# EAGLE board hacksaw_control_r0 (EAGLE 7.3.0)
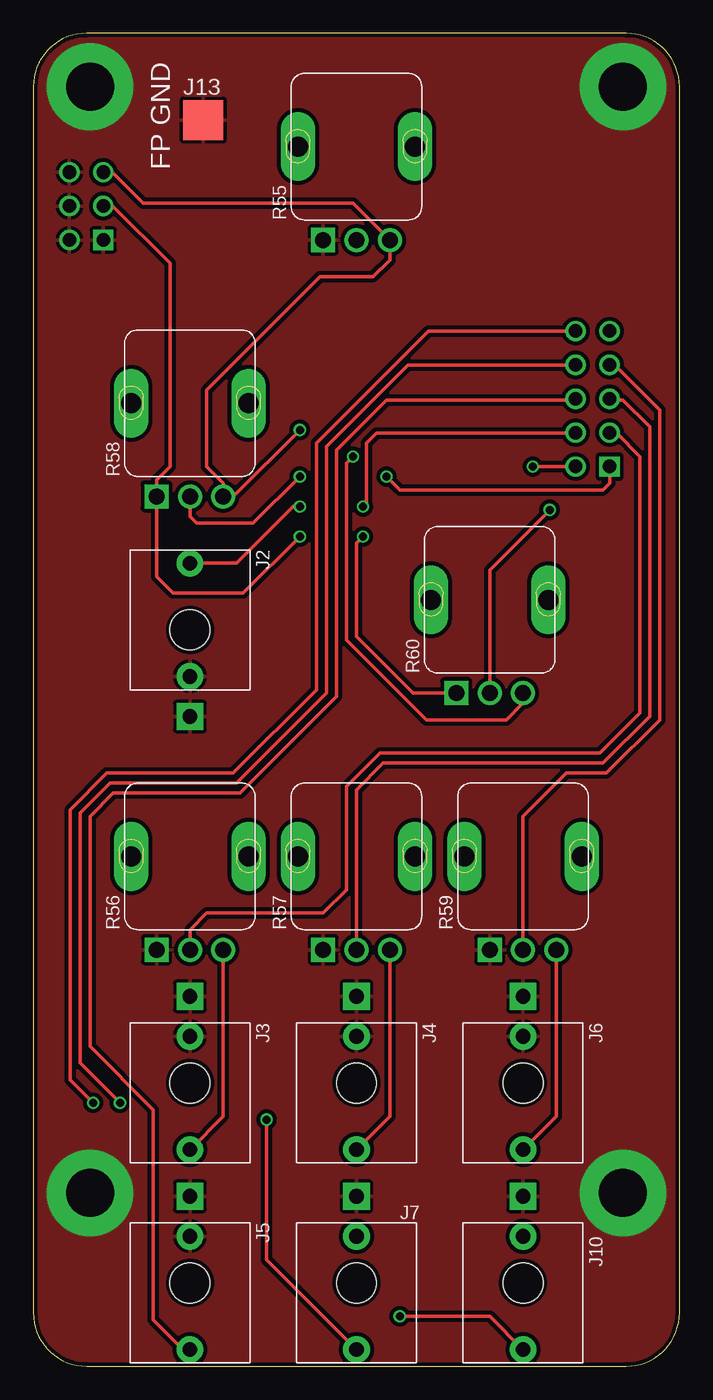
[diagram p0: board, top side]
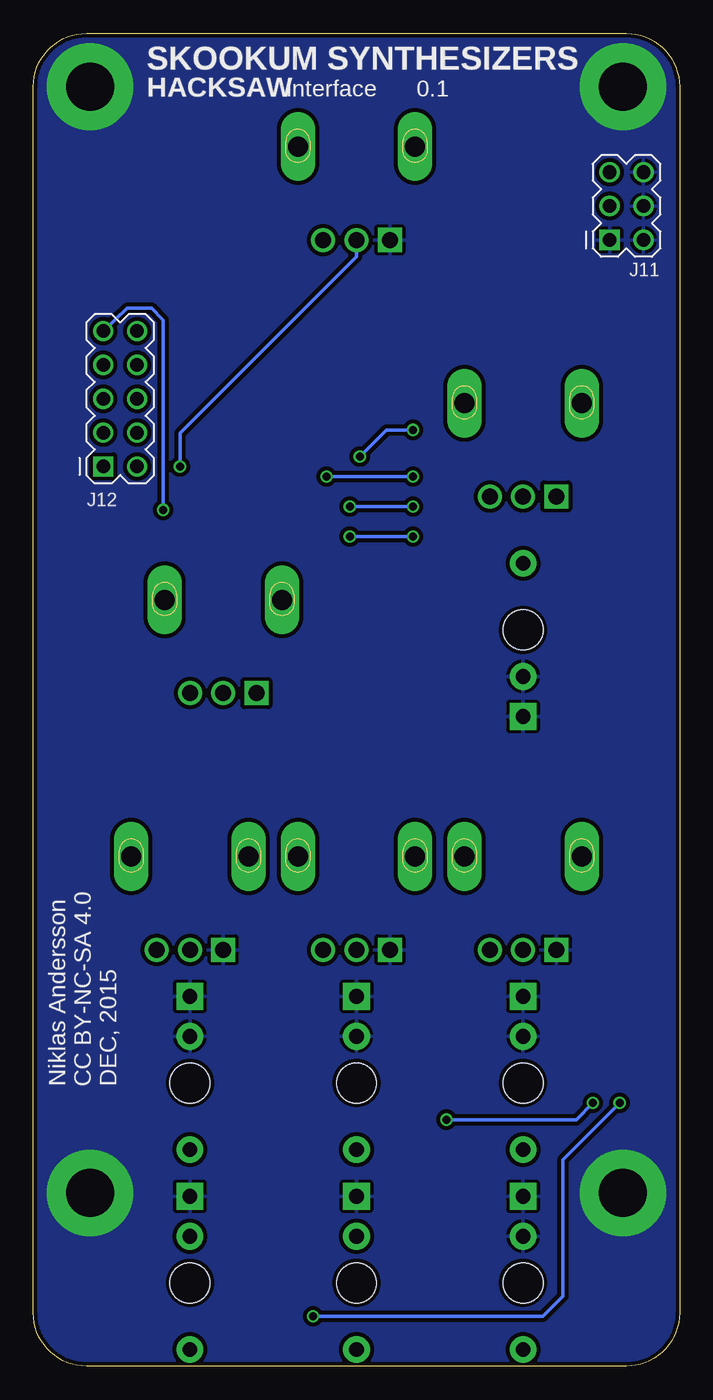
[diagram p1: board, bottom side, seen from below]

Size 48.5 x 100 mm. Coordinates in mm from the lower left corner, seen from the top.
Outline: 48.5,4 48.5,96 arc90 44.5,100 4,100 arc90 0,96 0,4 arc90 4,0 44.5,0 arc90 48.5,4
Copper layers (1*16): Top 0.035mm / dielectric 1.5mm / Bottom 0.035mm
Design rules "dirt_cheap_dirty_boards.v1 *": minimum track width 5mil, minimum drill 12mil, track to track 6mil, track to pad 6mil, pad to pad 6mil, via to via 6mil, smd to smd 0mil, copper to edge 10mil, drill to drill 10mil, minimum pad ring 10mil, minimum via ring 6mil, stop-mask expansion 2mil, vias tented up to drill 25mil, thermal gap 10mil

## Footprints (pad centres in the part's own frame; a part is rotated, then mirrored left to right if it is on the bottom)
WQP_PJ301M-12 = drill 1.1 pad 2 square: S 0,-6.5 | drill 1.1 pad 2: SW 0,-3.5; T 0,5 | hole 3: 0,0
HDR_M_3X2_REAR = drill 1.016 square: 1 0,0 | drill 1.016: 2 0,2.54; 3 2.54,0; 4 2.54,2.54; 5 5.08,0; 6 5.08,2.54
HDR_M_5X2_REAR = drill 1.016 square: 1 0,0 | drill 1.016: 2 0,2.54; 3 2.54,0; 4 2.54,2.54; 5 5.08,0; 6 5.08,2.54; 7 7.62,0; 8 7.62,2.54; 9 10.16,0; 10 10.16,2.54
FP_GND = smd 3 x 3 bottom: P$1 0,0
M3 = drill 3.6 pad 6.5: M3 0,0
PTV09 = drill 1.2 pad 1.8 square: 1 -2.5,-7 | drill 1.2 pad 1.8: 2 0,-7; 3 2.5,-7 | drill 1.5 pad 2.6 long: NC1 -4.4,0; NC2 4.4,0

## Placement (x,y rotation side)
J2  V/OCT  [WQP_PJ301M-12]  11.75,55.25 0 top
J3  EXP  [WQP_PJ301M-12]  11.75,21.25 180 top
J4  LIN  [WQP_PJ301M-12]  24.25,21.25 180 top
J5  SYNC  [WQP_PJ301M-12]  11.75,6.25 180 top
J6  PWM  [WQP_PJ301M-12]  36.75,21.25 180 top
J7  SAW  [WQP_PJ301M-12]  24.25,6.25 180 top
J10  PULSE  [WQP_PJ301M-12]  36.75,6.25 180 top
J11  CONN_HDR_3X22  [HDR_M_3X2_REAR]  5.25,84.5 90 top
J12  CONN_HDR_5X22  [HDR_M_5X2_REAR]  43.25,67.5 90 top
J13  TERMINAL_1SMT  [FP_GND]  12.75,93.5 0 bottom
M1  MOUNTING_HOLEM3  [M3]  44.25,96 0 top
M6  MOUNTING_HOLEM3  [M3]  4.25,13 0 top
M7  MOUNTING_HOLEM3  [M3]  44.25,13 0 top
M8  MOUNTING_HOLEM3  [M3]  4.25,96 0 top
R55  COARSE  [PTV09]  24.25,91.5 0 top
R56  EXP  [PTV09]  11.75,38.25 0 top
R57  LIN  [PTV09]  24.25,38.25 0 top
R58  FINE  [PTV09]  11.75,72.25 0 top
R59  PWM  [PTV09]  36.75,38.25 0 top
R60  PWM  [PTV09]  34.25,57.5 0 top

## Library data of the parts
J2-J7 J10-J13 M1 M6-M8 R55-R60 = 000

## Nets
1_COARSE: J12.2 R55.2
1_EXP: J12.3 R56.2
1_EXP_IN: J3.T R56.3
1_FINE: J12.1 R58.2
1_LIN: J12.5 R57.2
1_LIN_IN: J4.T R57.3
1_PULSE_OUT: J10.T J12.10
1_PWM: J12.7 R59.2
1_PWM_IN: J6.T R59.3
1_PWM_INIT: J12.9 R60.2
1_SAW_OUT: J7.T J12.8
1_SYNC_IN: J5.T J12.6
1_V/OCT: J2.T J12.4
+5V: J11.5 R55.3 R58.3 R60.3
-5V: J11.3 R58.1 R60.1
GND: J2.S J2.SW J3.S J3.SW J4.S J4.SW J5.S J5.SW J6.S J6.SW J7.S J10.S J11.1 J11.2 J11.4 J11.6 J13.P$1 M1.M3 M6.M3 M7.M3 M8.M3 R55.1 R56.1 R57.1 R59.1

## Tracks (layer width: path | path; a pad name or v marks a point on that pad's centre or on a via)
1_COARSE  (via drill 0.6)
  Top 0.25: v37.5,67.5 J12.2
  Bottom 0.25: v37.5,67.5 37.5,70 24.25,83.25 R55.2
1_EXP
  Top 0.25: R56.2 11.75,32.75 13,34 21.75,34 23.5,35.75 23.5,43.5 26,46 42.5,46 45.5,49 45.5,68.25 43.79,70 43.29,70 J12.3
1_EXP_IN
  Top 0.25: R56.3 14.25,18.75 J3.T
1_FINE  (via drill 0.6)
  Top 0.25: J12.1 43.25,66.25 42.75,65.75 27.5,65.75 v26.5,66.75 | R58.2 11.75,63.75 12.25,63.25 16.5,63.25 v20,66.75
  Bottom 0.25: v26.5,66.75 v20,66.75
1_LIN
  Top 0.25: R57.2 24.25,43.25 26.25,45.25 42.75,45.25 46.25,48.75 46.25,70.5 44.25,72.5 43.33,72.5 J12.5
1_LIN_IN
  Top 0.25: R57.3 26.75,18.75 J4.T
1_PULSE_OUT  (via drill 0.6)
  Top 0.25: J12.10 29.66,77.66 21.25,69.25 21.25,50.75 15,44.5 5.5,44.5 2.75,41.75 2.75,21.5 v4.5,19.75 | v27.5,3.75 34.25,3.75 J10.T
  Bottom 0.25: v27.5,3.75 10.25,3.75 8.75,5.25 8.75,15.5 v4.5,19.75
1_PWM
  Top 0.25: R59.2 36.75,41.25 40,44.5 43,44.5 47,48.5 47,71.75 43.63,75.12 J12.7
1_PWM_IN
  Top 0.25: R59.3 39.25,18.75 J6.T
1_PWM_INIT  (via drill 0.6)
  Top 0.25: R60.2 34.25,59.75 v38.75,64.25
  Bottom 0.25: v38.75,64.25 38.75,78.5 39.62,79.38 41.47,79.38 J12.9
1_SAW_OUT  (via drill 0.6)
  Top 0.25: J12.8 28.12,75.12 22,69 22,50.5 15.25,43.75 5.75,43.75 3.5,41.5 3.5,22.75 v6.5,19.75 | v17.5,18.5 17.5,8 J7.T
  Bottom 0.25: v6.5,19.75 7.75,18.5 v17.5,18.5
1_SYNC_IN
  Top 0.25: J12.6 40.38,72.5 26.5,72.5 22.75,68.75 22.75,50.25 15.5,43 6,43 4.25,41.25 4.25,24 9,19.25 9,3.5 11.25,1.25 J5.T
1_V/OCT  (via drill 0.6)
  Top 0.25: J12.4 40.42,70 25.75,70 25,69.25 25,64.75 v24.75,64.5 | J2.T 15.25,60.25 19.5,64.5 v20,64.5
  Bottom 0.25: v24.75,64.5 v20,64.5
+5V  (via drill 0.6)
  Top 0.25: J11.5 5.92,89.58 8.25,87.25 24,87.25 R55.3 26.75,83 25.5,81.75 21.5,81.75 13,73.25 13,67.5 14.25,66.25 R58.3 15,65.25 v20,70.25 | R60.3 36.75,49.75 35.5,48.5 29.5,48.5 23.5,54.5 23.5,67.75 v24,68.25
  Bottom 0.25: v20,70.25 22,70.25 v24,68.25
-5V  (via drill 0.6)
  Top 0.25: J11.3 5.96,87.04 10.25,82.75 10.25,67.5 9.25,66.5 R58.1 9.25,59.25 10.5,58 15.75,58 v20,62.25 | R60.1 28.5,50.5 24.25,54.75 24.25,61.75 v24.75,62.25
  Bottom 0.25: v20,62.25 v24.75,62.25
GND
  pour Bottom (isolate 0.3): 0,100 48.5,100 48.5,0 0,0
  pour Top (isolate 0.3): 0,100 48.5,100 48.5,0 0,0

## Text on the board
tPlace: FP GND
bPlace: SKOOKUM SYNTHESIZERS | 0.1 | interface | HACKSAW
bNames: Niklas Andersson / CC BY-NC-SA 4.0 / DEC, 2015